# Altium PCB JacdacRgbBar8Ec30 122.PcbDoc
Units mm, origin at the board's own origin, x right, y up, seen from the top; angles counter-clockwise.
Board outline 16.5 x 105 mm, 2 copper layers (Top Layer, Bottom Layer), stack 1.525 mm thick; 19 components, 10 nets, 57 pads, 10 vias.
Unrouted connection lines stored in the file: 10.
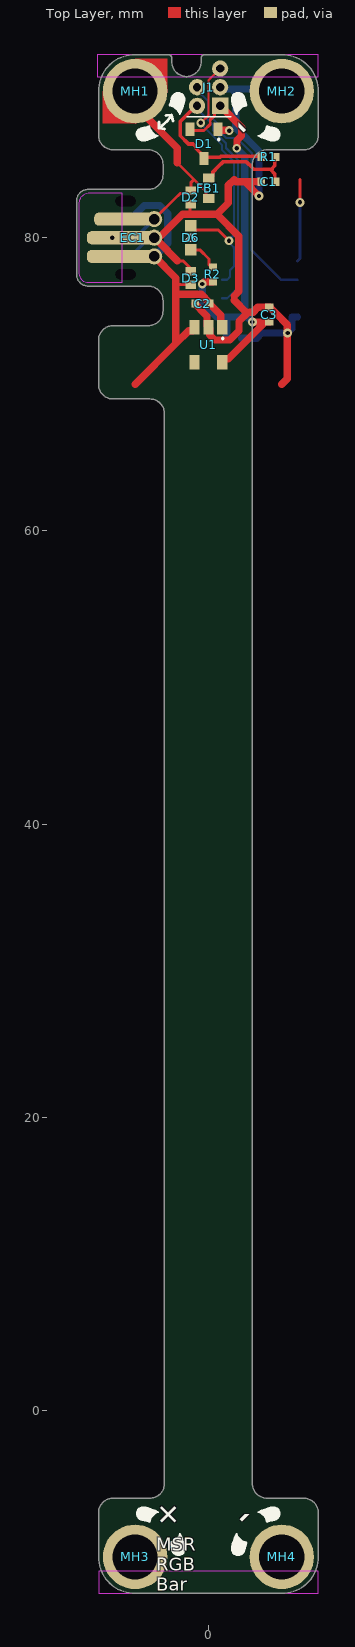
[diagram p0: Top Layer view]
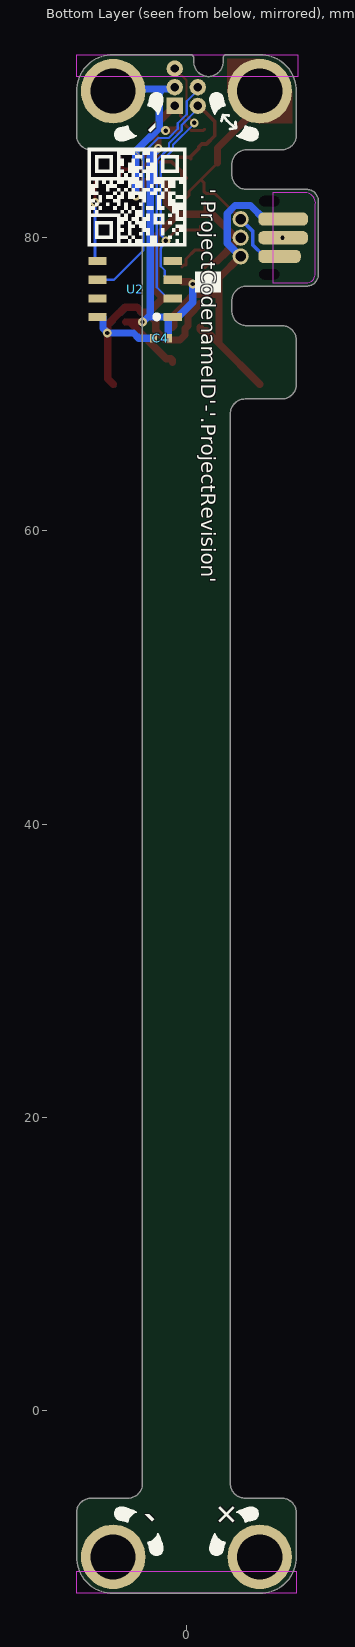
[diagram p1: Bottom Layer view, seen from below]

## Layer stack, top to bottom
Top Solder: solder mask 0.0102, Solder Resist, Dk 3.5
Top Layer: signal copper 0.0356
Dielectric 1: core 1.454, FR-4, Dk 4.2
Bottom Layer: signal copper 0.0356
Bottom Solder: solder mask 0.0102, Solder Resist, Dk 3.5

## Board outline
-7.5,-7 cw(c-6.5,-7) -6.5,-6 -4,-6 ccw(c-4,-5) -3,-5 -3,68 ccw(c-4,68) -4,69 -6.5,69 cw(c-6.5,70) -7.5,70 -7.5,73 cw(c-6.5,73) -6.5,74 -4.1,74 ccw(c-4.1,75) -3.1,75 -3.1,75.7 ccw(c-4.1,75.7) -4.1,76.7 -8.2,76.7 cw(c-8.2,77.5) -9,77.5 -9,82.5 cw(c-8.2,82.5) -8.2,83.3 -4.1,83.3 -4.098,83.3 ccw(c-4.098,84.3) -3.098,84.3 -3.1,84.3 -3.1,85 ccw(c-4.1,85) -4.1,86 -6.5,86 cw(c-6.5,87) -7.5,87 -7.5,86.97 -7.5,90 cw(c-5,90) -5,92.5 -2.75,92.5 cw(c-2.75,92.25) -2.5,92.25 -2.5,92 ccw(c-1.5,92) -0.5,92 -0.5,92.25 cw(c-0.25,92.25) -0.25,92.5 5,92.5 cw(c5,90) 7.5,90 7.5,87 cw(c6.5,87) 6.5,86 4,86 ccw(c4,85) 3,85 3,-5 ccw(c4,-5) 4,-6 6.5,-6 cw(c6.5,-7) 7.5,-7 7.5,-10 cw(c5,-10) 5,-12.5 -5,-12.5 cw(c-5,-10) -7.5,-10

## Design rules (kind name [scope] priority, off if disabled: settings)
AssemblyTestPointUsage [All] p1: valid=2
BoardOutlineClearance [All] p1: gap=0.3 ignorepadtopadclearanceinfootprint=FALSE except(0: Arc-SplitContinuation Track-SplitContinuation SMDPad-SplitContinuation THPad-SplitContinuation Via-SplitContinuation Fill-SplitContinuation Poly-SplitContinuation Region-OutlineEdge Region-SplitContinuation Text-OutlineEdge Text-SplitContinuation; 0.2: Track-OutlineEdge Fill-CavityEdge Fill-CutoutEdge Fill-SplitBarrior Poly-CavityEdge Poly-CutoutEdge Poly-SplitBarrior Text-CavityEdge Text-CutoutEdge Text-SplitBarrior; 0.25: SMDPad-OutlineEdge)
Clearance [All] p1: gap=0.125 ignorepadtopadclearanceinfootprint=FALSE except(0: Arc-Hole Track-Hole SMDPad-Hole THPad-Hole Via-Hole Fill-Hole Poly-Hole Region-Hole Text-Hole)
ComponentClearance [All] p1: gap=0.1 collisioncheckmode=3 verticalgap=0.254 showdistances=FALSE
DiffPairsRouting [All] p1: maxlimit=2 minlimit=0.15 mostfreqgap=0.15 toplayer_minwidth=0.15 toplayer_maxwidth=2 toplayer_prefwidth=0.15 bottomlayer_minwidth=0.15 bottomlayer_maxwidth=2 bottomlayer_prefwidth=0.15 substack1={CB9D278B-8BF5-444A-AAF4-837A2A9DF42D} toplayer_{cb9d278b-8bf5-444a-aaf4-837a2a9df42d}_minwidth=0.381 toplayer_{cb9d278b-8bf5-444a-aaf4-837a2a9df42d}_maxwidth=0.381 toplayer_{cb9d278b-8bf5-444a-aaf4-837a2a9df42d}_prefwidth=0.381 bottomlayer_{cb9d278b-8bf5-444a-aaf4-837a2a9df42d}_minwidth=0.381 bottomlayer_{cb9d278b-8bf5-444a-aaf4-837a2a9df42d}_maxwidth=0.381 bottomlayer_{cb9d278b-8bf5-444a-aaf4-837a2a9df42d}_prefwidth=0.381 substack2={826B8647-A721-4255-895A-19F9591B9CD1} toplayer_{826b8647-a721-4255-895a-19f9591b9cd1}_minwidth=0.381 toplayer_{826b8647-a721-4255-895a-19f9591b9cd1}_maxwidth=0.381 toplayer_{826b8647-a721-4255-895a-19f9591b9cd1}_prefwidth=0.381 bottomlayer_{826b8647-a721-4255-895a-19f9591b9cd1}_minwidth=0.381 bottomlayer_{826b8647-a721-4255-895a-19f9591b9cd1}_maxwidth=0.381 bottomlayer_{826b8647-a721-4255-895a-19f9591b9cd1}_prefwidth=0.381 substack3={E64FCAF4-1BC8-437D-B1E0-0E5F2DC0F59E} toplayer_{e64fcaf4-1bc8-437d-b1e0-0e5f2dc0f59e}_minwidth=0.381 toplayer_{e64fcaf4-1bc8-437d-b1e0-0e5f2dc0f59e}_maxwidth=0.381 toplayer_{e64fcaf4-1bc8-437d-b1e0-0e5f2dc0f59e}_prefwidth=0.381 bottomlayer_{e64fcaf4-1bc8-437d-b1e0-0e5f2dc0f59e}_minwidth=0.381 bottomlayer_{e64fcaf4-1bc8-437d-b1e0-0e5f2dc0f59e}_maxwidth=0.381 bottomlayer_{e64fcaf4-1bc8-437d-b1e0-0e5f2dc0f59e}_prefwidth=0.381 substack4={E61CE66C-507C-4E1E-8E83-C905434AFC1C} toplayer_{e61ce66c-507c-4e1e-8e83-c905434afc1c}_minwidth=0.381 toplayer_{e61ce66c-507c-4e1e-8e83-c905434afc1c}_maxwidth=0.381 toplayer_{e61ce66c-507c-4e1e-8e83-c905434afc1c}_prefwidth=0.381 bottomlayer_{e61ce66c-507c-4e1e-8e83-c905434afc1c}_minwidth=0.381 bottomlayer_{e61ce66c-507c-4e1e-8e83-c905434afc1c}_maxwidth=0.381 bottomlayer_{e61ce66c-507c-4e1e-8e83-c905434afc1c}_prefwidth=0.381 maxuncoupledlength=25
FabricationTestPointUsage [All] p1: valid=2 allowmultiple=FALSE
HoleSize [All] p1: absolutevalues=TRUE maxlimit=3.1 minlimit=0.2 maxpercent=80.000 minpercent=20.000
MinimumSolderMaskSliver [All] p1: minsoldermaskwidth=0.005
PlaneClearance [All] p1: clearance=0.3
PlaneConnect [All] p1: planeconnectstyle=Relief reliefexpansion=0.5 reliefentries=4 reliefconductorwidth=0.2 reliefairgap=0.3
PolygonConnect "PolygonConnect GND" [isVIA] p1: connectstyle=Relief reliefconductorwidth=0.2 reliefentries=4 polygonreliefangle="90 Angle" airgapwidth=0.2
PolygonConnect [All] p2: connectstyle=Relief reliefconductorwidth=0.2 reliefentries=4 polygonreliefangle="90 Angle" airgapwidth=0.2
RoutingVias [All] p1: holewidth=0.3 width=0.6 viastyle="Through Hole" minholewidth=0.3 minwidth=0.6 maxholewidth=0.5 maxwidth=0.8
SilkToSilkClearance [All] p1: silktosilkclearance=0.001
SilkToSolderMaskClearance [IsPad] p1: minsilkscreentomaskgap=0.05 clearancetoexposedcopper=TRUE
SolderMaskExpansion [All] p1: expansion=0.075 istentingtop=FALSE
Width [All] p1: maxlimit=2 minlimit=0.15 preferedwidth=0.15 substack1={CB9D278B-8BF5-444A-AAF4-837A2A9DF42D} substack2={826B8647-A721-4255-895A-19F9591B9CD1} substack3={E64FCAF4-1BC8-437D-B1E0-0E5F2DC0F59E} substack4={E61CE66C-507C-4E1E-8E83-C905434AFC1C} minimp=50.000000 maximp=50.000000 favimp=50.000000
20 further rules are at their usual default settings.

## Components (designator, comment, footprint, x,y, rotation, side; value= is the part's Value field where it differs from the comment)
C1 "CL05C330JB5NNNC" "C0402_0.55MM - without outline" 4.101,83.821 r0 top
C2 "CL05A105KP5NNNC" "C0402_0.55MM - without outline" -0.4,75.5 r0 top
C3 "CL05A105KP5NNNC" "C0402_0.55MM - without outline" 4.15,74.75 r270 top
C4 "CL05A105KP5NNNC" "C0402_0.55MM - without outline" 1.751,73.143 r180 bottom
D1 "BAT54S" "NXP-BAT54S-TO-236AB - WITHOUT OUTLINE" -0.3,86.4 r270 top
D2 "RCLAMP0521P-N" "TVS 0402 - XL" -1.2,82.75 r270 top
D3 "RCLAMP0521P-N" "TVS 0402 - XL" -1.2,77.25 r90 top
D6 "Everlight Elec'''" "0603 Orange - without outline" -1.2,80 r270 top
EC1 "3 pin JACDAC edge connector" JACDAC_EDGE_CONNECTOR_NO_TRACES -3.15,80 r90 top
FB1 "TDK MPZ1608S102ATA00" "TDK MPZ1608 0.8mm - without outline" 0.03,83.375 r90 top
J1 "Hack Connect Mini 1.27 mm pitch 2-row" HACK_CONNECT_MINI_5_X_1_27_0.559mm_TH 0.8,89 r0 top
MH1 "MH_7.0MMK_4.4MMC_3.1MMD_PTH" MH_7.0MMK_4.4MMC_3.1MMD_PTH -5,90 r0 top
MH2 "MH_7.0MMK_4.4MMC_3.1MMD_PTH" MH_7.0MMK_4.4MMC_3.1MMD_PTH 5,90 r180 top
MH3 "MH_7.0MMK_4.4MMC_3.1MMD_PTH" MH_7.0MMK_4.4MMC_3.1MMD_PTH -5,-10 r0 top
MH4 "MH_7.0MMK_4.4MMC_3.1MMD_PTH" MH_7.0MMK_4.4MMC_3.1MMD_PTH 5,-10 r180 top
R1 "RC0402FR-07220RL" "R0402 - Without outline" 4.101,85.521 r0 top
R2 "RC0402FR-071KL" "R0402 - Without outline" 0.301,77.5 r270 top
U1 "LDO 3.3V/300 mA" "ON_SEMI-SOT23-5 - WITHOUT OUTLINE" 0,72.7 r270 top
U2 "PFS122-S08" SOP-8 3.5,76.5 r0 bottom

## Footprints (in the part's own frame and the unit in brackets; to place one, negate y for a bottom-side part, rotate by r counter-clockwise, add the part's x,y. Pads: shape width x height; smd on the part's side, far side on the other; paste and mask are expansions set on the pad)
"0603 Orange - without outline" [mm]
  rect 0.8x0.8 smd paste-0.05: 1(-0.825,0) 2(0.825,0)
  silkscreen extent -0.25,-0.38 0.25,0.38, body extent -0.8,-0.4 0.8,0.4, height 0.54
"C0402_0.55MM - without outline" [mm]
  rect 0.5x0.55 smd: 1(-0.5,0) 2(0.5,0)
  body extent -0.5,-0.25 0.5,0.25, height 0.55
HACK_CONNECT_MINI_5_X_1_27_0.559mm_TH [mm] "50mil by 62mil pitch 22mil TH"
  rect 1.11x1.11 hole 0.559: 1(0,0)
  round 1.11 hole 0.559: 2(-1.575,0) 3(0,1.27) 4(-1.575,1.27) 5(0,2.54)
  silkscreen extent -2.29,-0.76 0.76,-0.76
JACDAC_EDGE_CONNECTOR_NO_TRACES [mm] "Jacdac 3 pin connector with no traces"
  rrect78% 0.9x2.9 smd far side paste-1 mask+0: 1(-1.27,3.2)
  rrect78% 0.9x4.3 smd paste-1 mask+0: 1(1.27,2.5)
  round 1.1 hole 0.71 paste-0.254 mask+0: 1(1.27,0.55) 2(0,0.55) 3(-1.27,0.55)
  rrect78% 0.9x3.4 smd far side paste-1 mask+0: 2(0,3.45) 2(0,3.45) 3(1.27,3.45)
  rrect78% 0.9x4.8 smd paste-1 mask+0: 2(0,2.75) 3(-1.27,2.75)
  round 0 hole 0.7 slot 1.4 at 90 deg unplated: ""(-2.5,2.5) ""(2.5,2.5)
  Top Layer keep-out region: -3.075,2.75 -3.07,5.033 -2.987,5.341 -2.761,5.567 -2.453,5.65 -2.453,5.65 2.27,5.65 2.545,5.635 2.794,5.516 2.978,5.31 3.07,5.05 3.07,5.05 3.07,2.75
  Bottom Layer lines w0.2: -1.27,0.85 -1.126,0.85
  Bottom Layer keep-out region: -3.07,2.75 -3.07,5.033 -3.023,5.269 -2.889,5.469 -2.689,5.603 -2.453,5.65 -2.453,5.65 2.27,5.65 2.546,5.635 2.794,5.516 2.978,5.31 3.07,5.05 3.07,5.05 3.07,2.75
MH_7.0MMK_4.4MMC_3.1MMD_PTH [mm] "Jacdac mounting hole 7.0mm clearance, 4.4 annualar ring and 3.1mm PTH"
  round 4.4 hole 3.08 mask+0.3: 1(0,0)
"NXP-BAT54S-TO-236AB - WITHOUT OUTLINE" [mm] "SOT23, 3-Leads, Body 2.90x2.30mm, Pitch 0.95mm, IPC Medium Density"
  rect 0.9x0.6 smd: 1(-1,0.95) 2(-1,-0.95) 3(1,0)
  silkscreen extent -0.35,0.95 -0.25,1.05, body extent -1.32,-1.5 1.32,1.5, height 1.12
"ON_SEMI-SOT23-5 - WITHOUT OUTLINE" [mm]
  rect 1x0.7 smd: 1(-1.2,0.95) 2(-1.2,0) 3(-1.2,-0.95) 4(1.2,-0.95) 5(1.2,0.95)
  silkscreen extent -0.47,0.93 -0.38,1.02, body extent -1.5,-1.57 1.5,1.58, height 1.1
"R0402 - Without outline" [mm]
  rect 0.5x0.55 smd: 1(-0.5,0) 2(0.5,0)
  body extent -0.5,-0.25 0.5,0.25, height 0.35
SOP-8 [mm] "Pitch:1.27mm,Width:150mil"
  rect 1.25x0.55 smd: 1(-2.575,1.905) 2(-2.575,0.635) 3(-2.575,-0.635) 4(-2.575,-1.905) 5(2.575,-1.905) 6(2.575,-0.635) 7(2.575,0.635) 8(2.575,1.905)
  silkscreen extent -1.52,1.85 -1.43,1.95, body extent -3,-2.55 3,2.54, height 1.3
"TDK MPZ1608 0.8mm - without outline" [mm]
  rect 0.6x0.8 smd paste-0.1: 1(-0.7,0) 2(0.7,0)
  body extent -0.8,-0.4 0.8,0.4, height 0.8
"TVS 0402 - XL" [mm] "TVS 0402 RoHS"
  rect 0.6x0.7 smd paste-0.06 mask+0.05: 1(-0.45,0) 2(0.45,0)
  body extent -0.5,-0.3 0.5,0.3, height 0.5

## Part data
C1: "CAP CER 33PF 50V C0G/NP0 0402", Capacitance=33pF, Case Code (Imperial)=0402, Case Code (Metric)=1005, Dielectric=C0G, Manufacturer=Samsung, Max Operating Temperature=125°C, Min Operating Temperature=-55°C, Package Quantity=1, Supplier Part Number 1=1276-1272-1-ND, Temperature Coefficient=300ppm/°C, Tolerance=5%, Voltage=50V, Case/Package=0402, Category="Ceramic Capacitors", ComponentLink1Description="Online datasheet", ComponentLink1URL=https://datasheet.ciiva.com/15195/getdatasheetpartid-355282-15195687.pdf, Construction=Flat, Contact Plating=Tin, Depth=0.5mm, Height=0.5mm, Lead Free="Lead Free", Length=1mm, Manufacturer Part Number=CL05C330JB5NNNC, Material=Ceramic, Mount="Surface Mount", Packaging="Tape and Reel", Pricing 1="1=0.10000, 10=0.02300, 50=0.01260, 100=0.01040, 500=0.00740, 1000=0.00582, 2500=0.00529, 5000=0.00487 (USD)", Pricing 2="1=0.12500, 25=0.02900, 100=0.01300, 250=0.01100, 500=0.00900, 1000=0.00600 (USD)", Pricing 3="1=0.10000, 10=0.01400, 50=0.01400, 100=0.01100, 1000=0.00600, 10000=0.00400 (USD)", Pricing 4="150=0.01120, 500=0.00860, 2500=0.00640, 5000=0.00550 (GBP)", Radiation Hardening=No, RoHS=Yes, RoHS Compliant=Yes, Series=CL, Stock 1=5436088, Stock 2=45340, Stock 3=8877, Stock 4=10934, Supplier 1=Digi-Key, Supplier 2=Newark, Supplier 3=Mouser, Supplier 4=Farnell, Supplier Part Number 2=82AC9259, Supplier Part Number 3=187-CL05C330JB5NNNC, Supplier Part Number 4=3013373RL, Thickness=0.022inch, Voltage Rating=50V, Voltage Rating (DC)=50V, Width=0.02inch
C2 C3 C4: "CAP CER 1UF 10V X5R 0402", Capacitance=1µF, Case Code (Imperial)=0402, Case Code (Metric)=1005, Dielectric=X5R, Manufacturer=Samsung, Max Operating Temperature=85°C, Min Operating Temperature=-55°C, Package Quantity=1, Supplier Part Number 1=1276-1076-1-ND, Tolerance=10%, Voltage Rating=10V, Case/Package=0402, Category=Capacitors, Checked=?, ComponentLink1Description="Online datasheet", ComponentLink1URL=https://datasheet.ciiva.com/15195/getdatasheetpartid-358390-15195630.pdf, Contact Plating=Tin, Created=DG, Depth=0.5mm, Height=0.5mm, Length=1mm, Manufacturer Part Number=CL05A105KP5NNNC, Material=Ceramic, Mount="Surface Mount", Packaging="Tape and Reel", Pricing 1="1=0.10000, 10=0.03900, 50=0.02100, 100=0.01720, 500=0.01228, 1000=0.00965, 2500=0.00877, 5000=0.00807 (USD)", Pricing 2="1=0.10000, 10=0.04200, 100=0.01800, 500=0.01300, 1000=0.01000, 2500=0.00900 (USD)", Pricing 3="10=0.02450, 100=0.02000, 500=0.01310, 2500=0.00920, 5000=0.00810, 10000=0.00640, 50000=0.00490 (GBP)", Radiation Hardening=No, RoHS=Yes, Stock 1=5705569, Stock 2=928941, Stock 3=53670, Supplier 1=Digi-Key, Supplier 2=Mouser, Supplier 3=Farnell, Supplier Part Number 2=187-CL05A105KP5NNNC, Supplier Part Number 3=3013329, Thickness=0.022inch, Width=0.02inch
D1: "DIODE ARRAY SCHOTTKY 30V SOT23", Manufacturer=Nexperia, Manufacturer Part Number=BAT54S,235, Supplier Part Number 1=1727-1868-1-ND, Category="Rectifier Diodes", ComponentLink1Description="NXP datasheet online", ComponentLink1URL=https://assets.nexperia.com/documents/data-sheet/BAT54_SER.pdf, Pricing 1="1=0.13000, 10=0.11900, 100=0.05610, 500=0.03326, 1000=0.02185, 5000=0.02138 (USD)", RoHS=No, Stock 1=14011, Supplier 1=Digi-Key, Supplier 2=Mouser, Supplier 3=RSComponents, Supplier Part Number 2=771-BAT54S235, Supplier Part Number 3=1707990
D2 D3: "Bidirectional 5V (Max) 6V 16V 3.5A (8/20us) 0402 TVS RoHS", Manufacturer="Born Semiconductor", Package=0402, Supplier1 Part Number=C316043, Checked By=?, ComponentLink1Description="Online datasheet", ComponentLink1URL=https://datasheet.lcsc.com/szlcsc/Bourne-Semicon-Shenzhen-RCLAMP0521P-N_C316043.pdf, Created By="D Gakure", Manufacturer Part Number=RCLAMP0521P-N, Supplier1=LCSC
D6: library part 19-217/S2C-AQ1R1B/3T, "LED ORANGE DIFFUSED 1608 SMD", Case Code (Imperial)=0603, Case Code (Metric)=1608, Color=Orange, Forward Voltage=2.05V, Lens Color=White, Manufacturer="Everlight Elec", Supplier 1 Part Number=C146215, Test Current=25mA, Case/Package=0603, Category=LEDs, Colour=Orange, ComponentLink1Description="Online datasheet", ComponentLink1URL=https://datasheet.lcsc.com/lcsc/1912171731_Everlight-Elec-19-217-S2C-AQ1R1B-3T_C146215.pdf, Dominant Wavelength=605nm, Height=0.65mm, Lead Free="Lead Free", Length=1.6mm, Lens Transparency=Diffused, Luminous Intensity=100mcd, Manufacturer Part Number=19-217/S2C-AQ1R1B/3T, Mount="Surface Mount", RoHS=Yes, Supplier 1=LCSC, Width=0.8mm
EC1: library part "Jacdac edge connector", "3 pin Jacdac edge connector 1.27mm pitch", Manufacturer Part Number=JACDAC_EDGE_CONNECTOR, Checked By=?, ComponentLink1Description="Yuliang JACDAC cable connector drawing online", ComponentLink1URL=https://github.com/microsoft/jacdac-mdk/blob/main/connector/JACDAC-Connector-by-Yuliang-2020-11-28.pdf, ComponentLink2Description="JACDAC PCB edge connector spec onlin", ComponentLink2URL=https://github.com/microsoft/jacdac-mdk/blob/main/connector/JACDAC_PCB_Edge_Connector_Drawing_JD-PEC-01_rev_01.pdf, Created By="D. Gakure", PCB Type="1.6mm FR4"
FB1: "0603 1k@100MHz 0.8A chip", Case Code (Imperial)=0603, Case Code (Metric)=1608, Current Rating=800mA, DC Resistance (DCR)=300mR, Manufacturer=TDK, Manufacturer Part Number=MPZ1608S102ATA00, Package Quantity=4000, Supplier Part Number 1=445-8694-1-ND, Tolerance=25%, Case/Package=0603, ComponentLink2Description="datasheet online", ComponentLink2URL=https://www.mouser.co.uk/datasheet/2/400/eads_commercial_power_mpz1608_en-923650.pdf, ComponentLink3Description=datasheet, ComponentLink3URL="Y:\System\Altium\Libraries 2014\TDK\Datasheets\eads_commercial_power_mpz1608_en-923650.pdf", Core Material=Ferrite, Height=0.037inch, Impedance="1kR @ 100MHz", Length=0.063inch, Max DC Current=800mA, Mount="Surface Mount", Packaging="Tape and Reel", Pricing 1="1=0.1, 10=0.079, 25=0.0716, 50=0.0644, 100=0.0472, 250=0.03432, 500=0.03146, 1000=0.02717 (USD)", Stock 1=113542, Supplier 1=Digi-Key, Supplier 2=Mouser, Supplier Part Number 2=810-MPZ1608S102ATA00, Width=0.031inch
J1: library part HACK_CONNECT_MINI
MH1 MH2 MH3 MH4: "Mounting Hole 7.0mm keepout, 4.4mm annualar ring and 3.1mm Drill PTH", Annular Ring=4.4mm, Hole Clearance=7.0mm, Hole Diameter=3.1mm, Hole Size=M3, Hole Type=PTH
R1: "RES SMD 220 OHM 1% 1/16W 0402", Case Code (Imperial)=0402, Case Code (Metric)=1005, Manufacturer=Yageo, Max Operating Temperature=155°C, Max Power Dissipation=63mW, Min Operating Temperature=-55°C, Package Quantity=1, Power Rating=62.5mW, Resistance=220R, Resistor Type="Thick Film", Supplier Part Number 1=311-220LRCT-ND, Temperature Coefficient=100ppm/°C, Tolerance=1%, Voltage Rating=50V, Case/Package=0402, Category=Resistors, Checked=?, ComponentLink1Description="Online datasheet", ComponentLink1URL=https://datasheet.ciiva.com/11819/0900766b80c66297-11819466.pdf, Created=D.G, Depth=0.5mm, Features="Moisture Resistant", Height=0.016inch, Lead Free="Lead Free", Length=1mm, Manufacturer Part Number=RC0402FR-07220RL, Military Standard=Not, Number of Pins=2, Number of Terminations=2, Packaging="Tape and Reel", Pricing 1="1=0.10000, 10=0.01400, 100=0.00580, 1000=0.00262, 2500=0.00228, 5000=0.00188 (USD)", Pricing 2="1=0.10000, 10=0.01200, 100=0.00400, 1000=0.00400, 2500=0.00400, 10000=0.00300 (USD)", Pricing 3="1=0.08130, 25=0.01210, 100=0.01120, 250=0.01030, 500=0.00900 (GBP)", REACH SVHC="No SVHC", RoHS=Yes, Stock 1=1286042, Stock 2=324625, Stock 3=18234, Supplier 1=Digi-Key, Supplier 2=Mouser, Supplier 3=Farnell, Supplier Part Number 2=603-RC0402FR-07220RL, Supplier Part Number 3=2147864, Termination=SMD/SMT, Voltage Rating (DC)=50V, Width=0.02inch
R2: "RES SMD 1K OHM 1% 1/16W 0402", Case Code (Imperial)=0402, Case Code (Metric)=1005, Manufacturer=Yageo, Max Operating Temperature=155°C, Min Operating Temperature=-55°C, Power Rating=62.5mW, Resistance=1k, Resistor Type="Thick Film", Supplier Part Number 1=311-1.00KLRDKR-ND, Temperature Coefficient=100ppm/°C, Tolerance=1%, Voltage Rating=50V, Case/Package=0402, Category=Resistors, Checked=?, ComponentLink2Description="Online datasheet", ComponentLink2URL=https://datasheet.ciiva.com/12666/pyu-rc0402-51-rohs-l-6-r-12666741.pdf, Created=D.G, Depth=0.5mm, Height=0.32mm, Lead Free="Lead Free", Length=1mm, Manufacturer Part Number=RC0402FR-071KL, Military Standard=Not, Number of Pins=2, Packaging="Tape and Reel", Pricing 1="1=0.10000, 10=0.01400, 100=0.00580, 1000=0.00262, 2500=0.00228, 5000=0.00188 (USD)", Pricing 2="1=0.10000, 10=0.01200, 100=0.00400, 1000=0.00400, 2500=0.00400, 10000=0.00300 (USD)", Pricing 3="1=0.08130, 25=0.01210, 100=0.01120, 250=0.01030, 500=0.00900 (GBP)", REACH SVHC=Unknown, RoHS=Yes, Stock 1=37591306, Stock 2=11912978, Stock 3=29900, Supplier 1=Digi-Key, Supplier 2=Mouser, Supplier 3=Farnell, Supplier Part Number 2=603-RC0402FR-071KL, Supplier Part Number 3=2132441, Termination=SMD/SMT, Voltage Rating (DC)=50V, Width=0.5mm
U1: library part NCP114BSN330T1G, "CMOS Low Dropout Regulator (LDO), 300 mA 3.3V, Non-Active Discharge, TSOP5", Case/Package=TSOP, Manufacturer="ON Semiconductor", Max Input Voltage=5.5V, Max Operating Temperature=85°C, Max Output Current=300mA, Min Input Voltage=1.7V, Min Operating Temperature=-40°C, Output Voltage=3.3V, Quiescent Current=50uA, Supplier Part Number 1=NCP114BSN330T1GOSCT-ND, Accuracy=2%, Category="Voltage Regulators - Linear", ComponentLink1Description="Datasheet (online)", ComponentLink1URL=http://www.farnell.com/datasheets/2118270.pdf?src-supplier=Farnell, Lead Free="Lead Free", Manufacturer Part Number=NCP114BSN330T1G, Mount="Surface Mount", Number of Outputs=1, Number of Pins=5, Output Type=Fixed, Polarity=Positive, Pricing 1="1=0.45000, 10=0.33700, 25=0.29440, 100=0.19060, 250=0.15780, 500=0.12624, 1000=0.09679 (USD)", RoHS=Yes, RoHS Compliant=Yes, Stock 1=4067, Supplier 1=Digi-Key, Supplier 2=Mouser, Supplier 3=RSComponents, Supplier Part Number 2=863-NCP114BSN330T1G, Supplier Part Number 3=1263179
U2: library part PFS122-SO8, "8bit MTP MCU with 12-bit ADC", Manufacturer=PADAUK, Package=SOP-8, ComponentLink1Description="Online datasheet", ComponentLink1URL=http://www.padauk.com.tw/upload/doc/PFS122%20datasheet_EN_V001_20220518.pdf, Manufacturer Part Number=PFS122-S08

## Via types
v1: diameter 0.6, hole 0.3, Top Layer to Bottom Layer, tented both sides, 10 vias

## Nets (pads, with @x,y where several pads share a name; then routed paths per layer and width w, separated by ;. In a path a pad name is that pad's centre, name@x,y a point inside that pad or via, vN(x,y) a via of type N, cw(c..) or ccw(c..) an arc to the next point about the centre after c; other vN are vias at no path point)
3V3: C3.2 C4.2 D1.2 J1.1 R2.2 U1.5 U2.1 | length 31.2
  Top Layer w0.2: D1.2 -1.161,87.311 -0.308,87.311 0.125,87.744 0.125,88.043 0.424,88.342 0.424,88.624 J1.1
  Top Layer w0.5: v1(-0.425,76.847) -0.398,76.847 -0.245,77 R2.2 ; J1.1 2.286,87.514 2.255,87.482 2.255,86.956 1.945,86.646 1.945,86.119 v1(1.926,86.1) ; U1.5 0.95,71.65 1.05,71.75 1.375,71.75 3.875,74.25 ; v1(3,74.25) 3.046,74.25 3.875,74.25 ; C3.2 3.875,74.25
  Bottom Layer w0.5: v1(-0.425,76.847) -0.425,75.595 0.55,74.62 0.9,74.62 U2.1 U2.1@1.226,74.595 ; C4.2@1.251,73.143 1.251,74.57 U2.1@1.226,74.595 ; v1(1.926,86.1) 1.926,86.073 2.475,85.524 2.475,74.795 2.275,74.595 U2.1@1.226,74.595 ; 2.475,74.595 2.628,74.595 2.973,74.25 v1(3,74.25)
BUTTON: U2.5 | length 5.6
  Top Layer w0.2: v1(6.25,82.408) 6.25,83.975
  Bottom Layer w0.2: U2.5 6.25,78.58 v1(6.25,82.408)
GND: C1.1 C2.1 C3.1 C4.1 D1.1 D2.2 D3.2 EC1.2 J1.3 MH2.1 MH4.1 U1.2 U2.8 | length 54.8
  Top Layer w0.2: -2.12,78.42 -1.72,78.42 D3.2@-1.25,77.95 ; -1.258,81.6 D2.2@-1.258,82.392
  Top Layer w0.5: -2.12,78.42 -2.775,79.075 -2.775,79.113 -3.662,80 -3.7,80 -3.585,80.115 -3.25,80.115 -1.765,81.6 -1.258,81.6 0.58,81.6 ; C2.1 -0.9,75.475 -0.525,75.1 -0.525,75.07 -0.1,74.645 -0.1,74 0.1,73.8 0.1,73.37 0.445,73.025 1.455,73.025 2.088,73.658 2.088,74.292 2.72,74.925 3.05,74.925 3.375,75.25 4.175,75.25 4.55,74.875 4.58,74.875 5.381,74.074 5.381,73.519 v1(5.4,73.5) 5.381,73.481 5.381,70.381 5,70 ; D1.1 0.65,87.38 0.7,87.33 1.406,87.33 v1(1.425,87.311) ; 1.75,75.725 2.635,74.84 ; 1.75,76.025 2.075,76.35 2.075,80.105 0.58,81.6 ; v1(3.45,82.85) 2.628,83.672 2.628,83.821 ; C1.1@3.601,83.821 2.628,83.821 ; 0.58,81.6 1.35,82.37 1.35,83.575 1.75,83.975 1.904,83.821 2.628,83.821
  Bottom Layer w0.5: J1.3 0.917,90.153 1.599,90.153 ; C4.1@2.251,73.143 3.251,73.143 3.608,73.5 v1(5.4,73.5) 5.4,73.527 5.7,73.827 5.7,74.57 5.725,74.595 U2.8 ; v1(3.45,82.85) 3.45,85.919 1.862,87.507 1.862,89.891 1.599,90.153 ; MH2.1 4.847,90.153 1.599,90.153
  other v1: -6.55,80
ICPCK: J1.4 U2.6 | length 17
  Bottom Layer w0.15: J1.4 -0.775,90.068 -0.02,89.313 -0.02,88.427 0.596,87.811 0.596,87.433 1.218,86.811 1.922,86.811 2.95,85.783 2.95,79.131 4.946,77.135 U2.6
JD_DATA: D2.1 EC1.1 FB1.1 MH1.1 | length 17.8
  Top Layer w0.2: MH1.1@-5,89 MH1.1 ; EC1.1@-3.7,81.27 -2.12,82.85 -2.1,82.85 -1.925,83.025 -1.325,83.025 D2.1@-1.25,83.1 ; -2.12,85.108 -0.983,83.971 -0.17,83.158 -0.17,82.875 FB1.1 ; D2.1 -1.2,83.125 -1.2,83.754 -1.033,83.921
  Top Layer w0.5: MH1.1@-5,89 -2.12,86.12 -2.12,85.108
  Bottom Layer w0.25: EC1.1@-6.325,78.73 -5.3,78.73 -4.511,79.519 -4.511,80.459 EC1.1@-3.7,81.27
JD_DATA_MCU/ICPDA: D1.3 J1.2 R1.1 U2.2 | length 23.8
  Top Layer w0.25: J1.2 -0.854,89 -1.925,87.929 -1.925,86.956 -1.359,86.391 -1.041,86.391 -0.829,86.179 -0.829,86.079 D1.3@-0.3,85.55 ; D1.3 -0.3,85.5 0.791,85.5 0.841,85.55 3.572,85.55 R1.1
  Bottom Layer w0.15: J1.2 -0.775,88.793 0.321,87.697 0.321,87.319 1.192,86.448 1.192,86.127 2.025,85.293 2.025,76.615 1.275,75.865 U2.2
JD_PWR: C2.2 D3.1 EC1.3 MH3.1 U1.1 U1.3 | length 25.6
  Top Layer w0.2: -2.22,76.825 -2.195,76.8 D3.1@-1.25,76.8
  Top Layer w0.5: -5,70 -2.22,72.78 ; EC1.3@-3.7,78.73 -2.22,77.25 -2.22,76.825 -2.22,76.15 ; U1.3 -0.95,73.75 -1.05,73.65 -1.35,73.65 -2.22,72.78 ; U1.1 0.85,74 0.85,74.725 0.1,75.475 0.1,75.525 -0.254,75.879 -0.254,75.909 -0.495,76.15 -2.22,76.15 ; -2.22,72.78 -2.22,76.15
  Bottom Layer w0.5: EC1.3@-6.575,81.27 -5.3,81.27 -4.375,82.195 -3.317,82.195 -2.775,81.653 -2.775,79.617 -3.662,78.73 EC1.3@-3.7,78.73
JD_STATUS/ICVPP: D6.1 J1.5 U2.3 | length 20
  Top Layer w0.15: v1(-0.525,87.836) -0.506,87.836 0,88.342 0,90.74 J1.5@0.76,91.5
  Top Layer w0.2: D6.1 -1.175,80.8 -0.95,80.8 -0.95,80.575 -0.9,80.525 0.675,80.525 1.4,79.8 v1(1.4,79.794)
  Bottom Layer w0.15: v1(-0.525,87.836) -0.525,87.776 0.917,86.334 0.917,86.013 1.75,85.18 1.75,80.192 1.406,79.848 v1@1.406,79.794 ; J1.5@0.76,91.5 0.84,91.5 J1.5 ; U2.3 1.275,77.135 1.475,77.335 1.475,77.772 1.75,78.047 1.75,79.275 1.725,79.3 1.725,79.361 1.4,79.686 v1(1.4,79.794)
NetC1_2: C1.2 FB1.2 R1.2 | length 6.9
  Top Layer w0.25: FB1.2 0.13,84.075 0.305,84.25 0.305,84.484 0.659,84.837 0.996,85.175 2.591,85.175 3.095,84.671 4.204,84.671 4.278,84.598 4.513,84.362 4.513,83.908 C1.2@4.601,83.821 ; 4.351,84.671 4.351,84.746 4.528,84.923 4.528,85.448 R1.2
NetD6_2: D6.2 R2.1 | length 2.2
  Top Layer w0.2: D6.2 -0.595,79.175 0.03,78.55 0.03,78.15 0.151,78.15 R2.1
pads on no net: EC1. U1.4 U2.4 U2.7

## Polygon pours and split planes (outlines as drawn)
no net on Bottom Assy "NONET_L-01_P-001" (hatched 45Degree grid 0.3 track 0.02): -7.501,72.449 -7.5,73 cw(c-6.5,73) -6.5,74 -4.1,74 ccw(c-4.1,75) -3.1,75 -3.1,75.7 ccw(c-4.1,75.7) -4.1,76.7 -8.2,76.7 cw(c-8.2,77.5) -9,77.5 -9,82.5 cw(c-8.2,82.5) -8.2,83.3 -4.1,83.3 ccw(c-4.1,84.3) -3.1,84.3 -3.1,85 ccw(c-4.1,85) -4.1,86 -6.5,86 cw(c-6.5,87) -7.5,87 -7.5,87.003 -7.5,90 cw(c-5,90) -5,92.5 -2.729,92.5 -2.75,92.5 cw(c-2.75,92.25) -2.5,92.25 -2.5,92 ccw(c-1.5,92) -1.656,91.012 -1.65,91.015 cw(c-5,90) -2,88.197 -2,73.5 -5,73.5 ccw(c-5,70)
no net on Bottom Assy "NONET_L-01_P-001" (hatched 45Degree grid 0.3 track 0.01): -7.5,-10 ccw(c-5,-10) -5,-12.5 -2.729,-12.5 5,-12.5 ccw(c5,-10) 7.5,-10 7.5,-7.552 7.501,-7.552 ccw(c5,-10) 1.646,-11 -1.646,-11 ccw(c-5,-10) -7.501,-7.551 -7.5,-7.551
no net on Bottom Assy "NONET_L-01_P-001" (hatched 45Degree grid 0.3 track 0.01): -1.476,91.018 ccw(c-1.476,92.018) -0.476,92.018 -0.476,92.268 cw(c-0.226,92.268) -0.226,92.518 5.024,92.518 cw(c5.024,90.018) 7.524,90.018 7.524,87.569 cw(c5.024,90.018) 1.67,91.018
no net on Bottom Assy "NONET_L-01_P-001" (hatched 45Degree grid 0.15 track 0.01): 3.342,-12.5 cw(c5,-10) 7.5,-8.342 7.5,-10 cw(c5,-10) 5,-12.5
no net on Bottom Assy "NONET_L-01_P-001" (hatched 45Degree grid 0.15 track 0.01): -7.5,-8.342 cw(c-5,-10) -3.342,-12.5 -5,-12.5 cw(c-5,-10) -7.5,-10
no net on Bottom Assy "NONET_L-01_P-001" (hatched 45Degree grid 0.15 track 0.01): 7.5,88.342 cw(c5,90) 3.342,92.5 5,92.5 cw(c5,90) 7.5,90
no net on Bottom Assy "NONET_L-01_P-001" (hatched 45Degree grid 0.15 track 0.01): -7.5,88.342 ccw(c-5,90) -3.342,92.5 -5,92.5 ccw(c-5,90) -7.5,90
no net on Bottom Assy "NONET_L-01_P-001" (hatched 45Degree grid 0.15 track 0.01): -4.3,77.125 -8.2,77.125 cw(c-8.2,77.525) -8.6,77.525 -8.6,77.527 -8.6,82.47 -8.6,82.467 cw(c-8.2,82.467) -8.2,82.867 -8.198,82.867 -4.3,82.867
no net on Fabrication Notes "NONET_L-01_P-001" (hatched 45Degree grid 0.6 track 0.01): -9.5,70 -3,70 -2.988,70 -2.989,84.01 -3,84 -9.5,84 -9.489,84.01

## Keep-outs
Keep-Out Layer:
  region: 7.5,91 7.5,92.5 -7.6,92.5 -7.6,91
  region: 7.5,-12.5 7.5,-11 -7.5,-11 -7.5,-12.5

## Other copper
Top Layer:
  region net JD_DATA: -7.215,87.8 -4.9,87.8 -2.8,89.9 -2.8,92.215 -4.984,92.215 -7.215,89.985

## Silkscreen, mask and mechanical layers (free items; w line width, h text height)
Top Overlay:
  lines w0.1: -4.398,86.607 ccw(c-5.024,90) -3.423,86.944 cw(c-3.229,87.72) -4.026,87.653 ; -4.376,86.612 cw(c-4.469,87.052) -4.563,87.492 ccw(c-5.024,90) -4.051,87.643 ; -4.374,-6.607 cw(c-5,-10) -3.399,-6.944 ccw(c-3.206,-7.72) -4.003,-7.653 ; -4.352,-6.612 ccw(c-4.446,-7.052) -4.539,-7.492 cw(c-5,-10) -4.027,-7.643 ; -2.677,89.003 cw(c-2.744,88.206) -1.967,88.4 ccw(c-5.024,90) -1.631,89.374 ; -2.666,89.027 ccw(c-5.024,90) -2.516,89.539 cw(c-2.075,89.446) -1.635,89.352 ; -2.653,-9.003 ccw(c-2.72,-8.206) -1.944,-8.4 ; -2.643,-9.027 cw(c-5,-10) -2.492,-9.539 ccw(c-2.052,-9.446) -1.612,-9.352 ; -1.944,-8.399 cw(c-5,-10) -1.607,-9.374 ; 1.584,-9.374 cw(c4.976,-10) 1.92,-8.399 ; 1.584,89.374 ccw(c4.976,90) 1.92,88.399 cw(c2.696,88.206) 2.629,89.003 ; 1.588,-9.352 ccw(c2.028,-9.446) 2.469,-9.54 ; 1.588,89.352 cw(c2.028,89.446) 2.469,89.54 ; 1.92,-8.4 ccw(c2.696,-8.206) 2.629,-9.003 ; 2.468,-9.539 cw(c4.976,-10) 2.619,-9.027 ; 2.468,89.539 ccw(c4.976,90) 2.619,89.027 ; 3.98,-7.653 ccw(c3.182,-7.72) 3.376,-6.944 cw(c4.976,-10) 4.35,-6.607 ; 3.98,87.653 cw(c3.182,87.72) 3.376,86.944 ccw(c4.976,90) 4.35,86.607 ; 4.004,-7.643 cw(c4.976,-10) 4.516,-7.492 ; 4.004,87.643 ccw(c4.976,90) 4.516,87.492 ; 4.329,-6.612 cw(c4.422,-7.052) 4.516,-7.492 ; 4.329,86.612 ccw(c4.422,87.052) 4.516,87.492
  lines w0.2: -3.376,87.884 -3.39,87.484 ; -2.997,87.408 -3.39,87.484 ; -2.907,88.345 -2.508,88.366 ; -2.424,87.975 -2.508,88.366 ; -3.39,87.484 ccw(c-5.024,90) -2.508,88.366
  lines w0.33: -4.124,87.445 ccw(c-3.783,87.302) -3.708,86.94 ; -4.1,-7.445 cw(c-3.759,-7.302) -3.685,-6.94 ; -2.469,89.1 cw(c-2.326,88.759) -1.963,88.685 ; -2.445,-9.1 ccw(c-2.302,-8.759) -1.94,-8.685 ; 1.916,-8.685 ccw(c2.278,-8.759) 2.422,-9.1 ; 1.916,88.685 cw(c2.278,88.759) 2.422,89.1 ; 3.661,-6.94 cw(c3.735,-7.302) 4.077,-7.445 ; 3.661,86.94 ccw(c3.735,87.302) 4.077,87.445
  lines w1: -4.454,87.055 ccw(c-5.024,90) -4.309,87.086 ; -4.43,-7.055 cw(c-5,-10) -4.285,-7.086 ; -2.11,89.285 ccw(c-5.024,90) -2.078,89.43 ; -2.086,-9.285 cw(c-5,-10) -2.055,-9.43 ; 2.031,-9.43 cw(c4.976,-10) 2.063,-9.285 ; 2.031,89.43 ccw(c4.976,90) 2.063,89.285 ; 4.262,-7.086 cw(c4.976,-10) 4.407,-7.055 ; 4.262,87.086 ccw(c4.976,90) 4.407,87.055
  text "-" at 3.619,88.146 h3.5 r135
  text "-" at 3.123,-8.643 h3.5 r45
  text "+" at -2.95,-8.67 h2.8 r315
  text "MSR / RGB / Bar" at -3.547,-12.3 h0.9
Bottom Overlay:
  drawing of 250 lines, arcs and shapes, not listed
  text "-" at 3.643,88.146 h3.5 r135
  text "'.ProjectCodenameID'-'.ProjectRevision'" at -1,83.35 h1 r90
  text "-" at 3.146,-8.643 h3.5 r45
  text "+" at -2.95,-8.67 h2.8 r315
Fabrication Notes:
  lines w0.01: -9.5,73 -3,73 ; -9.5,87 -3,87 ; -9.489,87.01 -9.488,73 ; -2.989,87.01 -2.988,73
  lines w0.2: -11.25,79.8 -7.4,77.5 -5.65,77.5 ; -11.25,80.2 -7.4,82.5 -5.65,82.5 ; -11.25,86 -9.5,86
  text "non-plated slots x2" at -22.299,79.593 h1.7
  text "no board edge pips/ / rat's teeth/mouse bites  / in this region - make  / sure board edge is clean" at -27.397,4 h1.7
Board Outline:
  lines w0.2: -7.5,86.97 -7.5,90 cw(c-5,90) -5,92.5 -2.75,92.5 cw(c-2.75,92.25) -2.5,92.25 -2.5,92 ccw(c-1.5,92) -0.5,92 -0.5,92.25 cw(c-0.25,92.25) -0.25,92.5 5,92.5 cw(c5,90) 7.5,90 ; -7.5,87 ccw(c-6.5,87) -6.5,86 -4.1,86 cw(c-4.1,85) -3.1,85 -3.1,84.3 ; -4.1,76.7 -8.2,76.7 cw(c-8.2,77.5) -9,77.5 -9,82.5 cw(c-8.2,82.5) -8.2,83.3 -4.1,83.3 ; -4.1,76.7 cw(c-4.1,75.7) -3.1,75.7 -3.1,75 cw(c-4.1,75) -4.1,74 -6.5,74 ccw(c-6.5,73) -7.5,73 -7.5,70 ccw(c-6.5,70) -6.5,69 -4,69 cw(c-4,68) -3,68 -3,-5 cw(c-4,-5) -4,-6 -6.5,-6 ccw(c-6.5,-7) -7.5,-7 -7.5,-10 ccw(c-5,-10) -5,-12.5 5,-12.5 ccw(c5,-10) 7.5,-10 7.5,-7 ccw(c6.5,-7) 6.5,-6 4,-6 cw(c4,-5) 3,-5 3,85 cw(c4,85) 4,86 6.5,86 ccw(c6.5,87) 7.5,87 ; -4.098,83.3 ccw(c-4.098,84.3) -3.098,84.3 ; 7.5,87 7.5,90
Component Keepout Dwg:
  lines w0.01: -7.5,73 cw(c-6.5,73) -6.5,74 -4.1,74 ccw(c-4.1,75) -3.1,75 -3.1,75.7 ccw(c-4.1,75.7) -4.1,76.7 -8.2,76.7 cw(c-8.2,77.5) -9,77.5 -9,82.5 cw(c-8.2,82.5) -8.2,83.3 -4.1,83.3 ccw(c-4.1,84.3) -3.1,84.3 -3.1,85 ccw(c-4.1,85) -4.1,86 -6.5,86 cw(c-6.5,87) -7.5,87
  lines w0.02: -7.501,72.449 -7.5,73 ; -5,73.5 -2,73.5
  lines w0.025: -7.501,-7.551 cw(c-5,-10) -1.646,-11 1.646,-11 cw(c5,-10) 7.501,-7.552 ; -7.5,-7.551 -7.5,-10 ccw(c-5,-10) -5,-12.5 -2.729,-12.5 5,-12.5 ccw(c5,-10) 7.5,-10 7.5,-7.552 ; -7.501,72.449 cw(c-5,70) -5,73.5 ; -7.5,87.003 -7.5,90 cw(c-5,90) -5,92.5 -2.729,92.5 ; -2.75,92.5 cw(c-2.75,92.25) -2.5,92.25 -2.5,92 ccw(c-1.5,92) -1.656,91.012 ; -2,73.5 -2,88.197 ccw(c-5,90) -1.65,91.015 ; -1.5,91 ccw(c-1.5,92) -0.5,92 -0.5,92.25 cw(c-0.25,92.25) -0.25,92.5

## Text inside footprints (layer, text, board x,y; h text height)
EC1: Mechanical 9 "Jacdac / cable connector  / body" at -13.158,75.179 h1.7 r90